# Altium PCB physio.PcbDoc
Units mil, origin at the board's own origin, x right, y up, seen from the top; angles counter-clockwise.
Board outline 1700 x 1300 mil, 2 copper layers (Top Layer, Bottom Layer); 5 components, 5 nets, 35 pads, 0 vias.
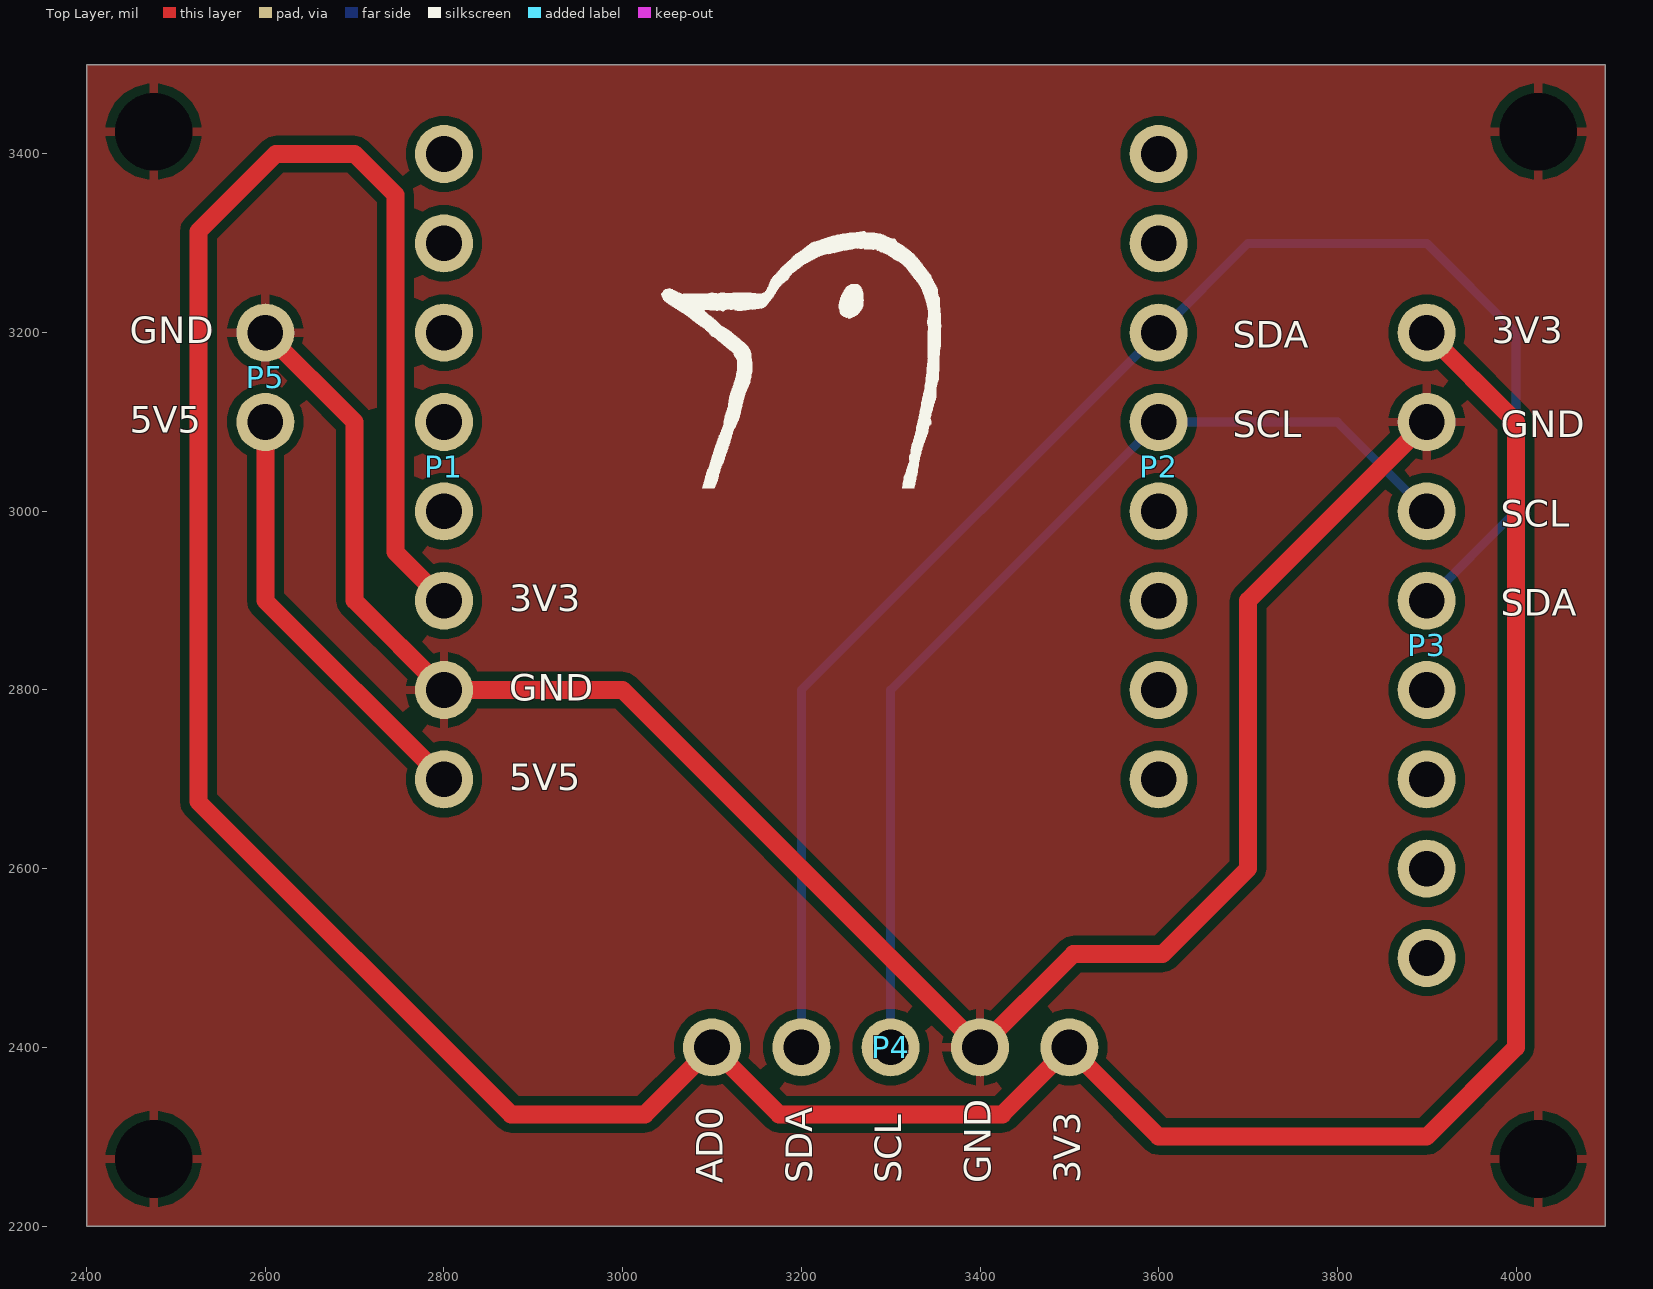
[diagram p0: Top Layer view]
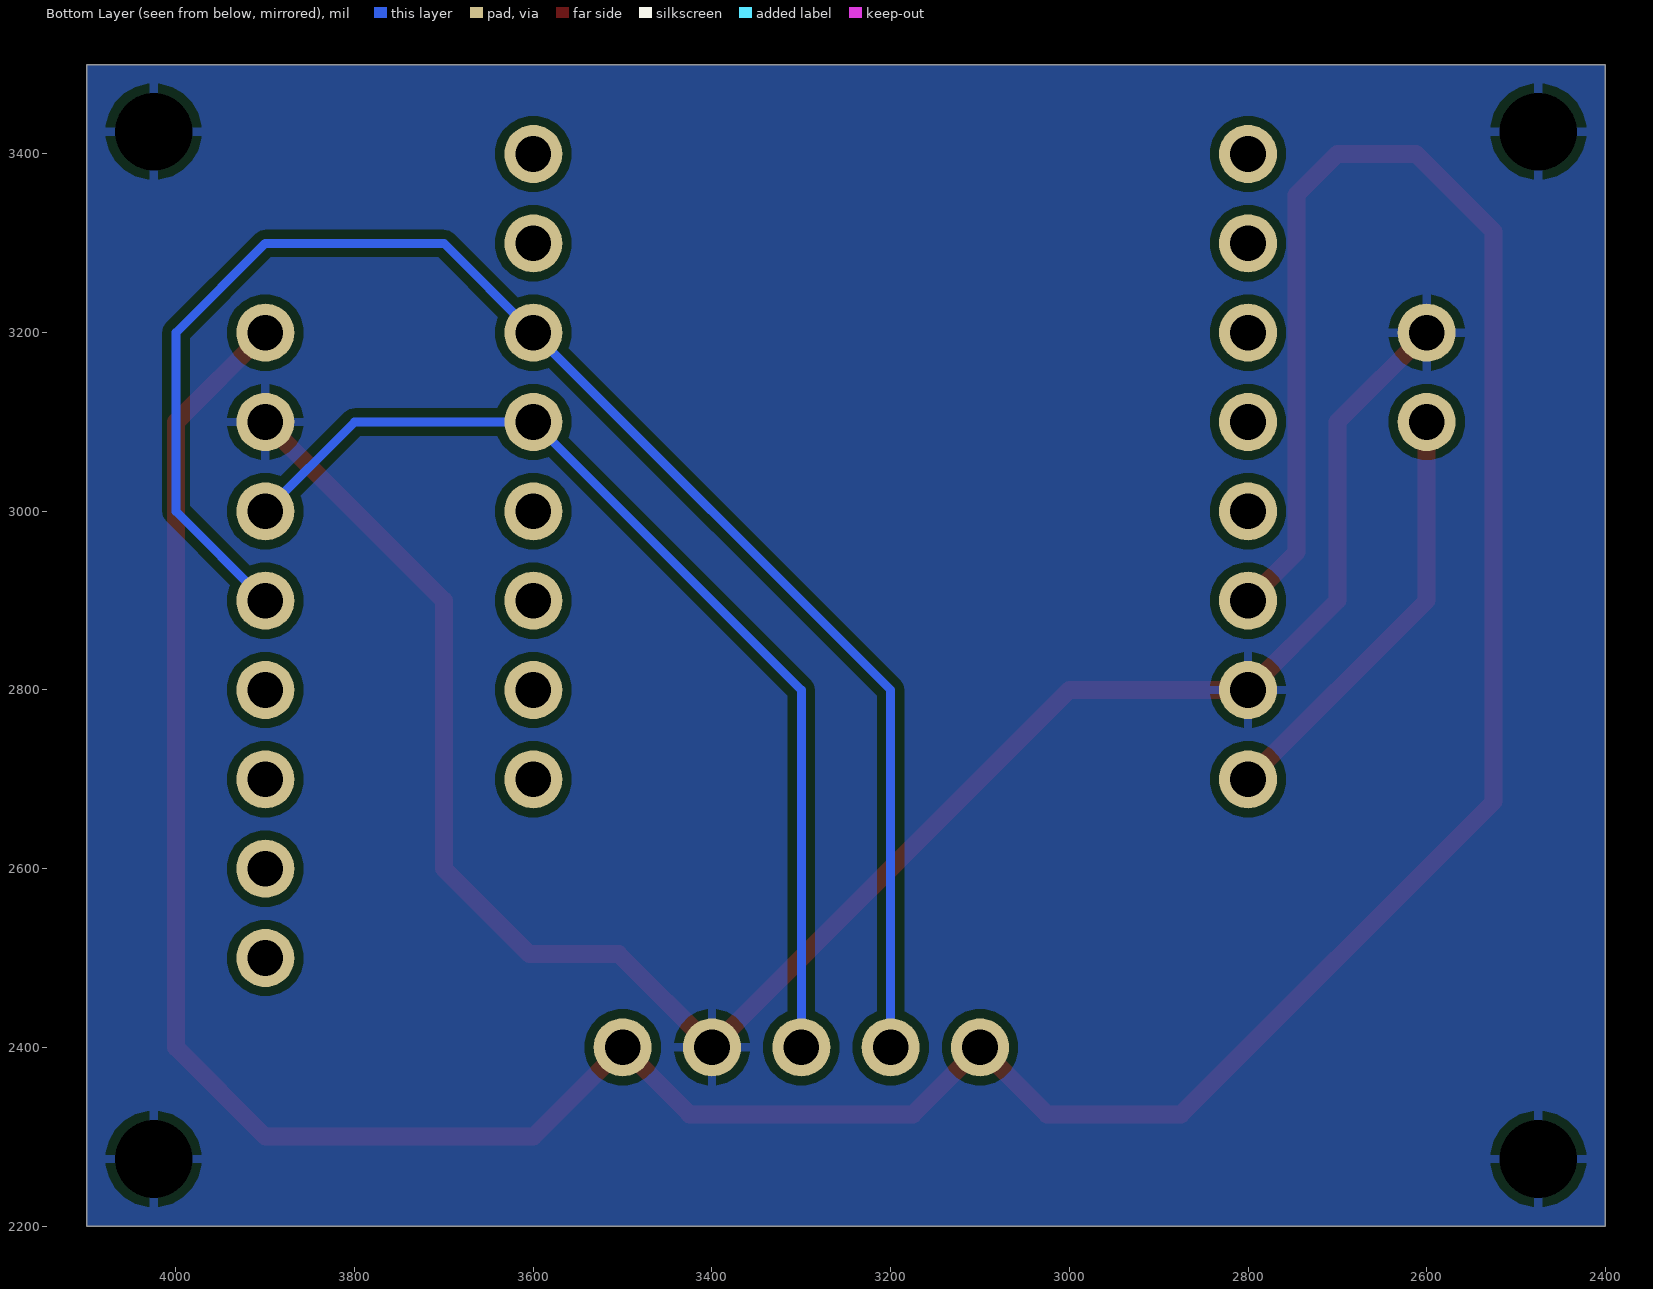
[diagram p1: Bottom Layer view, seen from below]

## Layer stack, top to bottom
Top Solder: solder mask 0.4, Solder Resist, Dk 3.5
Top Layer: signal copper 1.4
Dielectric 1: dielectric 12.6, FR-4, Dk 4.8
Bottom Layer: signal copper 1.4
Bottom Solder: solder mask 0.4, Solder Resist, Dk 3.5

## Board outline
2400,2200 2400,3500 4100,3500 4100,2200

## Design rules (kind name [scope] priority, off if disabled: settings)
Clearance [All] p1: gap=10 ignorepadtopadclearanceinfootprint=FALSE
PolygonConnect [All] p1: connectstyle=Relief reliefconductorwidth=10 reliefentries=4 polygonreliefangle="90 Angle" airgapwidth=10
RoutingVias [All] p1: holewidth=28 width=50 viastyle="Through Hole" minholewidth=28 minwidth=50 maxholewidth=28 maxwidth=50
SolderMaskExpansion [All] p1: expansion=0 istentingtop=FALSE
Width [All] p1: maxlimit=50 minlimit=10 preferedwidth=10 minimp=50.000000 maximp=50.000000 favimp=50.000000
30 further rules are at their usual default settings.

## Components (designator, comment, footprint, x,y, rotation, side; value= is the part's Value field where it differs from the comment)
P1 "Header 1x8" "HDR1x8 2.54mm" 2800,2700 r90 top
P2 "Header 1x8" "HDR1x8 2.54mm" 3600,2700 r90 top
P3 "Header 1x8" "HDR1x8 2.54mm" 3900,3200 r270 top
P4 "Header 1x5" "HDR1x5 2.54mm" 3500,2400 r180 top
P5 "Header 1x2" "HDR1x2 2.54MM" 2600,3100 r90 top

## Footprints (in the part's own frame and the unit in brackets; to place one, negate y for a bottom-side part, rotate by r counter-clockwise, add the part's x,y. Pads: shape width x height; smd on the part's side, far side on the other; paste and mask are expansions set on the pad)
"HDR1x2 2.54MM" [mil]
  round 65 hole 40: 1(0,0) 2(100,0)
"HDR1x5 2.54mm" [mil]
  round 65 hole 40: 1(0,0) 2(100,0) 3(200,0) 4(300,0) 5(400,0)
"HDR1x8 2.54mm" [mil]
  round 65 hole 40: 1(0,0) 2(100,0) 3(200,0) 4(300,0) 5(400,0) 6(500,0) 7(600,0) "8 "(700,0)

## Free pads (board coordinates)
  round 65 hole 87 unplated: 6(2475,3425) 7(2475,2275) 8(4025,2275) 9(4025,3425)

## Nets (pads, with @x,y where several pads share a name; then routed paths per layer and width w, separated by ;. In a path a pad name is that pad's centre, name@x,y a point inside that pad or via, vN(x,y) a via of type N, cw(c..) or ccw(c..) an arc to the next point about the centre after c; other vN are vias at no path point)
3V3: P1.3 P3.1 P4.1 P4.5 | length 4028.1
  Top Layer w20: P1.3 2745.69,2954.31 2745.69,3354.31 2700,3400 2611.72,3400 2525,3313.28 2525,2675 2875,2325 3025,2325 P4.5 3175,2325 3425,2325 P4.1 3600,2300 3900,2300 4000,2400 4000,3100 P3.1
5V5: P1.1 P5.1 | length 482.8
  Top Layer w20: P5.1 2600,2900 P1.1
GND: P1.2 P3.2 P4.2 P5.2 pad.6 pad.7 pad.8 pad.9 | length 2214.2
  Top Layer w20: P5.2 2700,3100 2700,2900 P1.2 3000,2800 P4.2 3504.31,2504.31 3604.31,2504.31 3700,2600 3700,2900 P3.2
SCL: P2.5 P3.3 P4.3 | length 1165.7
  Bottom Layer w10: P4.3 3300,2800 P2.5 3800,3100 P3.3
SDA: P2.6 P3.4 P4.4 | length 1789.9
  Bottom Layer w10: P4.4 3200,2800 P2.6 3700,3300 3900,3300 4000,3200 4000,3000 P3.4
pads on no net: "P1.8 " "P2.8 " "P3.8 " P1.4 P1.5 P1.6 P1.7 P2.1 P2.2 P2.3 P2.4 P2.7 P3.5 P3.6 P3.7

## Polygon pours and split planes (outlines as drawn)
GND on Bottom Layer "GND_L02_P001" (solid, pour order 1): 2400,3500 2400,2200 4100,2200 4100,3500
GND on Top Layer "GND_L01_P000" (solid, pour order 0): 2400,3500 2400,2200 4100,2200 4100,3500

## Silkscreen, mask and mechanical layers (free items; w line width, h text height)
Top Overlay:
  drawing of 2 lines, arcs and shapes, not listed
  text "GND" at 2448,3188 h30
  text "3V3" at 3973,3188 h30
  text "SDA" at 3683,3183 h30
  text "5V5" at 2448,3088 h30
  text "SCL" at 3683,3083 h30
  text "GND" at 3983,3083 h30
  text "SCL" at 3983,2983 h30
  text "3V3" at 2873,2888 h30
  text "SDA" at 3983,2883 h30
  text "GND" at 2873,2788 h30
  text "5V5" at 2873,2688 h30
  text "AD0" at 3112,2248 h30 r90
  text "SDA" at 3212,2248 h30 r90
  text "SCL" at 3312,2248 h30 r90
  text "GND" at 3412,2248 h30 r90
  text "3V3" at 3512,2248 h30 r90